# EAGLE board carbase (EAGLE 9.2.2)

Size 147.22 x 223.89 mm. Coordinates in mm from the lower left corner, seen from the top.
Outline: 49.72,60.62 arc-90 49.05,59.95 40.39,59.95 arc-91 39.72,60.62 39.72,62.28 arc-89 40.37,62.91 49.05,62.95 arc-90 49.72,62.28 49.72,60.62
Outline: 107.72,62.28 107.72,60.62 arc-91 107.07,59.96 98.39,59.96 arc-90 97.72,60.62 97.72,62.28 arc-90 98.41,62.96 107.04,62.96 arc-90 107.72,62.28
Outline: 93.22,137.46 arc-90 91.44,135.7 55.98,135.73 arc-89 54.22,137.46 54.22,163.86 arc-89 55.97,165.59 91.49,165.58 arc-89 93.22,163.86 93.22,137.46
Outline: 58.79,3.41 arc90 59.24,3.86 59.24,14.64 arc88 58.79,15.11 50.43,15.11 arc90 49.43,14.11 49.45,3.86 arc90 49.91,3.4 58.79,3.41
Outline: 133.74,8.43 arc-90 133.06,7.76 131.42,7.76 arc-90 130.74,8.43 130.74,17.09 arc-89 131.42,17.75 133.1,17.74 arc-89 133.76,17.09 133.74,8.43
Outline: 14.71,17.76 15.71,17.76 arc-90 16.71,16.76 16.71,8.8 arc-90 15.71,7.8 14.38,7.79 arc-88 13.71,8.43 13.71,16.76 arc-90 14.71,17.76
Outline: 97.97,3.87 97.94,14.65 arc86 97.52,15.11 88.62,15.11 arc88 88.15,14.62 88.13,3.89 arc92 88.62,3.41 97.52,3.41 arc90 97.97,3.87
Outline: 27.2,203.82 arc-91 26.54,203.15 24.89,203.15 arc-89 24.2,203.82 24.2,212.48 arc-89 24.89,213.15 26.54,213.15 arc-91 27.2,212.48 27.2,203.82
Outline: 123.24,203.82 arc-89 122.55,203.14 120.94,203.13 arc-90 120.24,203.82 120.24,212.47 arc-90 120.9,213.14 122.57,213.14 arc-90 123.24,212.47 123.24,203.82
Outline: 118.73,203.82 arc-91 118.06,203.14 116.42,203.14 arc-90 115.73,203.82 115.73,212.47 arc-89 116.41,213.14 118.07,213.14 arc-90 118.73,212.47 118.73,203.82
Outline: 105.56,203.14 103.92,203.15 arc-89 103.24,203.82 103.24,212.47 arc-90 103.9,213.14 105.57,213.14 arc-91 106.24,212.47 106.24,203.82 arc-91 105.56,203.14
Outline: 101.09,203.16 99.43,203.15 arc-89 98.74,203.82 98.74,212.47 arc-89 99.41,213.14 101.08,213.14 arc-91 101.74,212.47 101.74,203.82 arc-91 101.09,203.16
Outline: 48.71,203.82 arc-90 48.04,203.15 46.4,203.14 arc-90 45.71,203.82 45.71,212.47 arc-90 46.39,213.15 48.05,213.15 arc-91 48.71,212.47 48.71,203.82
Outline: 44.19,203.82 arc-89 43.51,203.15 41.88,203.14 arc-90 41.19,203.82 41.19,212.47 arc-90 41.85,213.14 43.53,213.14 arc-90 44.19,212.47 44.19,203.82
Outline: 31.71,203.82 arc-91 31.03,203.14 29.4,203.15 arc-88 28.71,203.82 28.71,212.47 arc-90 29.39,213.14 31.05,213.14 arc-90 31.71,212.47 31.71,203.82
Outline: 128.56,7.77 126.89,7.77 arc-89 126.22,8.44 126.22,17.09 arc-89 126.89,17.75 128.56,17.76 arc-91 129.22,17.09 129.22,8.44 arc-91 128.56,7.77
Outline: 116.07,7.76 114.42,7.76 arc-90 113.74,8.44 113.74,17.09 arc-89 114.42,17.75 116.08,17.75 arc-90 116.74,17.09 116.74,8.44 arc-90 116.07,7.76
Outline: 112.24,8.44 arc-89 111.58,7.78 109.91,7.78 arc-90 109.24,8.44 109.24,17.09 arc-91 109.92,17.77 111.56,17.76 arc-89 112.24,17.09 112.24,8.44
Outline: 38.21,8.44 arc-90 37.52,7.77 35.88,7.78 arc-88 35.21,8.44 35.21,17.09 arc-90 35.88,17.77 37.2,17.78 arc-90 38.21,16.78 38.21,8.44
Outline: 33.04,7.76 31.69,7.76 arc-90 30.69,8.76 30.69,16.76 arc-90 31.69,17.76 33.05,17.75 arc-91 33.69,17.09 33.69,8.44 arc-92 33.04,7.76
Outline: 21.21,8.44 arc-90 20.56,7.78 19.21,7.77 arc-90 18.21,8.77 18.21,16.79 arc-90 19.21,17.79 20.21,17.79 arc-90 21.21,16.79 21.21,8.44
Outline: 8.62,188.69 8.7,169.72 arc-90 5.01,166 arc89 0.01,161.05 0,160.25 0.1,119.86 0.08,117.06 arc90 4.01,113.11 arc-90 8.72,108.37 8.72,104 arc90 13.72,99 31.72,99 arc-90 36.72,94 36.72,39 arc-90 31.72,34 13.72,34 arc90 8.72,29 8.72,4.5 arc90 13.22,0 134.32,0.09 arc90 138.72,4.5 138.72,29 arc90 133.72,34 115.72,34 arc-90 110.72,39 110.72,93.9 arc-90 115.72,98.9 133.72,98.9 arc90 138.72,103.89 138.73,109.47 arc-90 142.35,113.08 arc90 147.22,117.96 147.21,125.83 147.21,160.95 arc90 142.21,165.95 arc-90 138.73,169.42 138.73,191.29 138.73,196.19 arc90 111.08,223.89 38.62,223.89 arc90 8.62,193.89 8.62,188.69
Copper layers (1*16): Top 0.035mm / dielectric 1.5mm / Bottom 0.035mm
Design rules "SeeedStudio_2layer_DRU_no_angle_20140221": minimum track width 6mil, minimum drill 12mil, track to track 6mil, track to pad 6mil, pad to pad 6mil, via to via 6mil, smd to smd 0mil, copper to edge 10mil, drill to drill 10mil, minimum pad ring 10mil, minimum via ring 6mil, stop-mask expansion 2mil, vias tented up to drill 100mil, thermal gap 10mil
Holes 3.1 mm at 4.19,139.56 143.26,139.55 87.73,219.65 87.72,196.65 59.72,196.64 59.71,219.65 106.72,179.62 106.73,98.99 40.72,98.99 106.72,84.28 40.71,84.29 106.72,21.86 40.71,21.87 40.72,179.62
Holes 2.7 mm at 98.64,184.09 94.5,179.37 96.89,164.46 49.36,184.09 53.2,179.36 48.59,165.72 94.49,113.57 81.27,113.67 98.65,126.13 53.21,113.56 49.35,126

## Placement (x,y rotation side)
E$1  [LOGO_FABO_L]  27.71,138.36 0 top

## Library data of the parts
E$1 = FaBo-Logo

## Text on the board
tPlace: Arduino | RaspberryPi | IchigoJam | Rev 1.0.0